# Altium PCB PCB.PcbDoc
Units mil, origin at the board's own origin, x right, y up, seen from the top; angles counter-clockwise.
Board outline 6000 x 4000 mil, 2 copper layers (Top Layer, Bottom Layer); 38 components, 82 nets, 220 pads, 24 vias.
Unrouted connection lines stored in the file: 58.
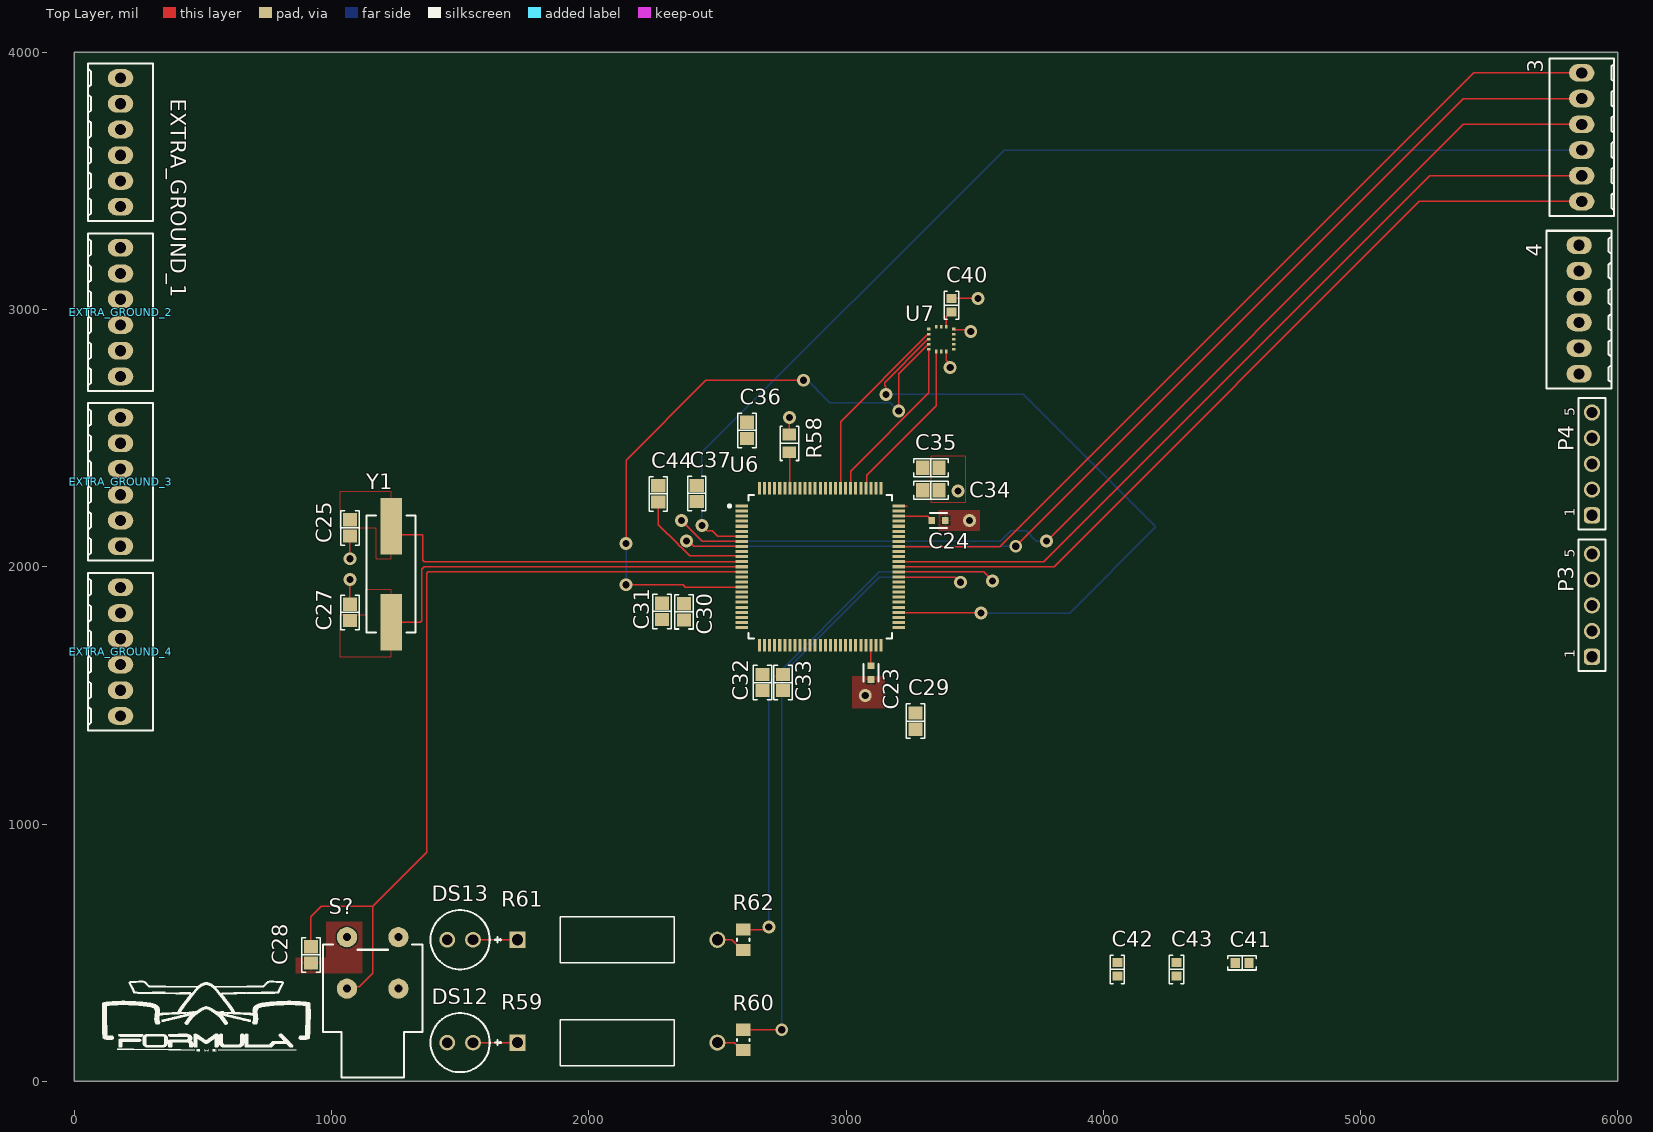
[diagram p0: Top Layer view]
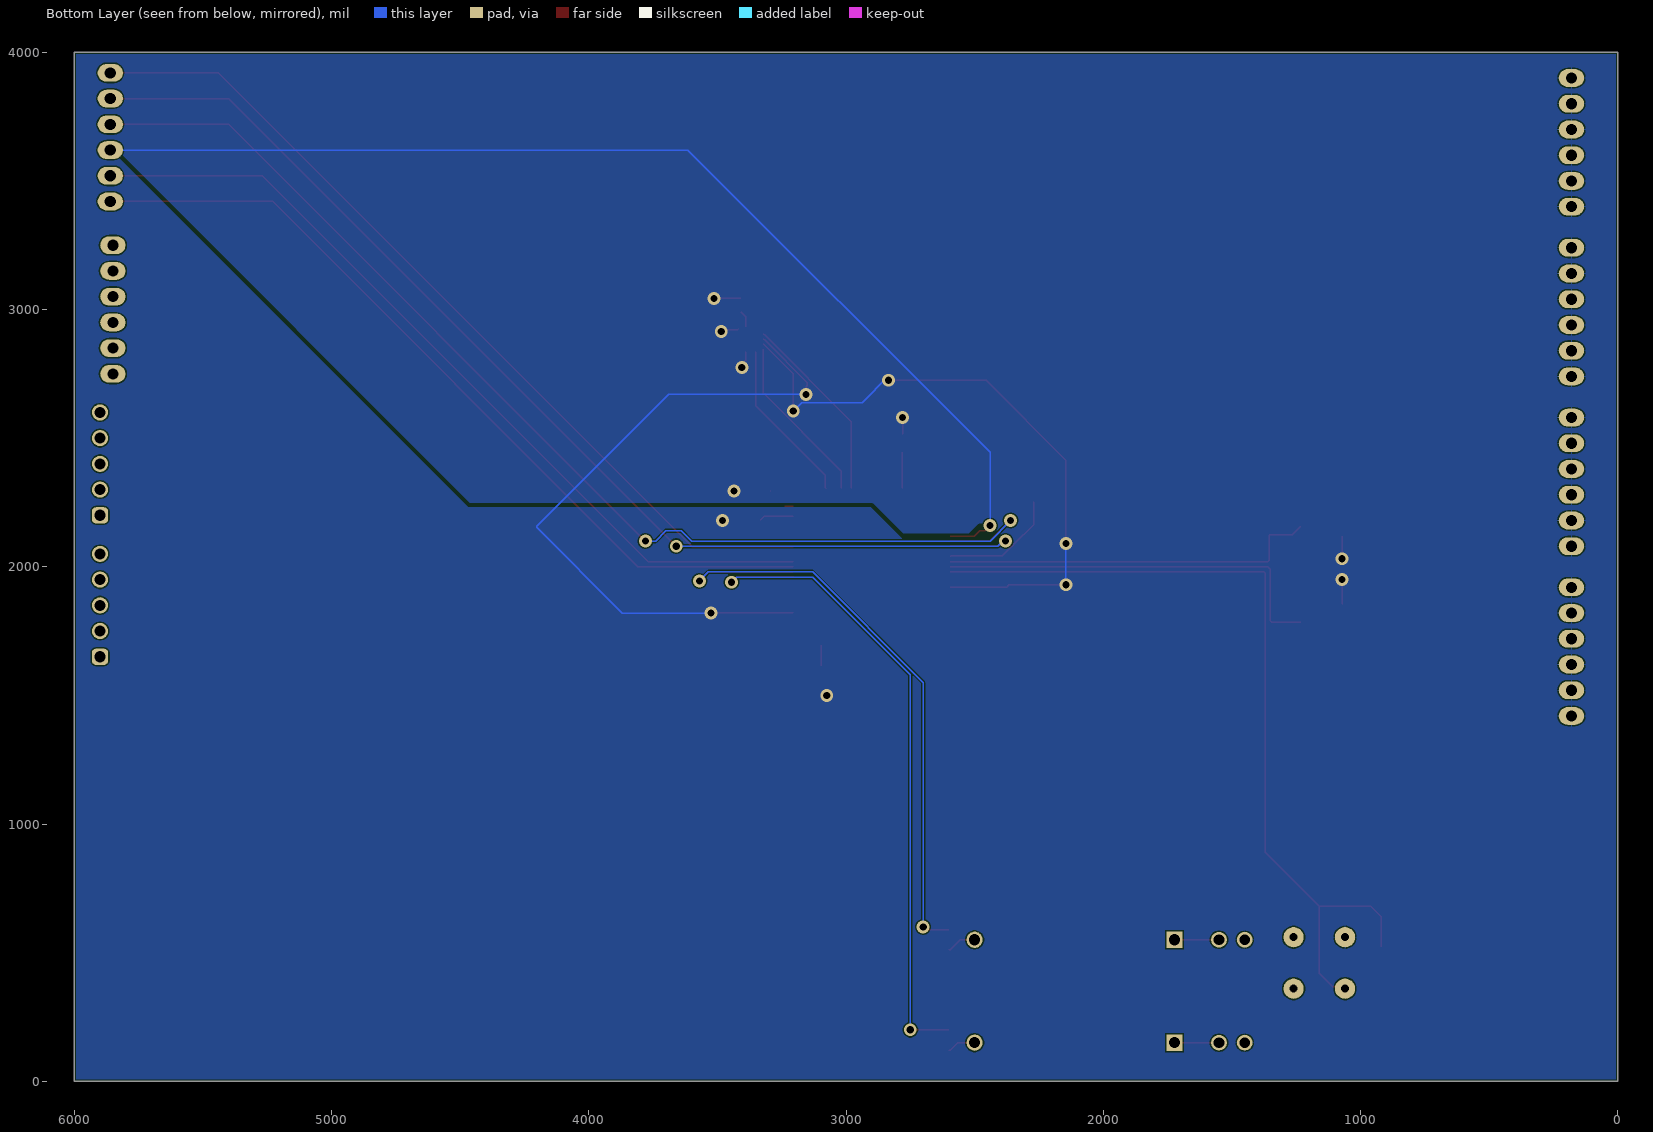
[diagram p1: Bottom Layer view, seen from below]

## Layer stack, top to bottom
Top Solder: solder mask 0.4, Solder Resist, Dk 3.5
Top Layer: signal copper 1.4
Dielectric 1: dielectric 12.6, FR-4, Dk 4.8
Bottom Layer: signal copper 1.4
Bottom Solder: solder mask 0.4, Solder Resist, Dk 3.5

## Board outline
0,0 6000,0 6000,4000 0,4000

## Design rules (kind name [scope] priority, off if disabled: settings)
BoardOutlineClearance [All] p1: gap=7.87 ignorepadtopadclearanceinfootprint=FALSE
Clearance [All] p1: gap=5 ignorepadtopadclearanceinfootprint=FALSE except(9.84: Arc-Hole Track-Hole SMDPad-Hole THPad-Hole Via-Hole Fill-Hole Poly-Hole Region-Hole Text-Hole)
ComponentClearance [All] p1: gap=5 collisioncheckmode=3 verticalgap=5 showdistances=TRUE
DiffPairsRouting [All] p1: maxlimit=10 minlimit=5 mostfreqgap=5 toplayer_minwidth=5 toplayer_maxwidth=1000 toplayer_prefwidth=5 bottomlayer_minwidth=5 bottomlayer_maxwidth=1000 bottomlayer_prefwidth=5 maxuncoupledlength=500
Height [All] p1: minheight=0 maxheight=71497.94 prefheight=500
HoleSize [All] p1: absolutevalues=TRUE maxlimit=248.03 minlimit=11.81 maxpercent=80.000 minpercent=20.000
HoleToHoleClearance [All] p1: gap=9.84 allowstackedmicrovias=FALSE
MinimumAnnularRing [All] p1: minimumring=3
MinimumSolderMaskSliver [All] p1: minsoldermaskwidth=0
PlaneClearance [All] p1: clearance=5
PlaneConnect PlaneConnectPowerPads [InPadClass('PowerPads')] p1: planeconnectstyle=Direct reliefexpansion=20 reliefentries=4 reliefconductorwidth=10 reliefairgap=10
PlaneConnect [All] p2: pad.planeconnectstyle=Relief pad.reliefexpansion=11.81 pad.reliefentries=4 pad.reliefconductorwidth=5 pad.reliefairgap=5 via.planeconnectstyle=Direct via.reliefexpansion=11.81 via.reliefentries=4 via.reliefconductorwidth=5 via.reliefairgap=5
PolygonConnect PolygonConnectPowerPads [All vs (InPadClass('PowerPads'))] p1: connectstyle=Direct reliefconductorwidth=10 reliefentries=4 polygonreliefangle="90 Angle" airgapwidth=10
PolygonConnect [All] p2: thpad.connectstyle=Relief thpad.reliefconductorwidth=5 thpad.reliefentries=4 thpad.polygonreliefangle="90 Angle" thpad.airgapwidth=5 smdpad.connectstyle=Relief smdpad.reliefconductorwidth=5 smdpad.reliefentries=4 smdpad.polygonreliefangle="90 Angle" smdpad.airgapwidth=5 via.connectstyle=Direct via.reliefconductorwidth=5 via.reliefentries=4 via.polygonreliefangle="90 Angle" via.airgapwidth=5
RoutingVias [All] p1: holewidth=11.81 width=23.62 viastyle="Through Hole" minholewidth=11.81 minwidth=23.62 maxholewidth=23.62 maxwidth=259.84
SilkToSilkClearance [All] p1: silktosilkclearance=0
SilkToSolderMaskClearance [IsPad] p1: minsilkscreentomaskgap=5 clearancetoexposedcopper=TRUE
SolderMaskExpansion [All] p1: expansion=2.95 istentingtop=FALSE
Width [All] p1: maxlimit=1000 minlimit=5 preferedwidth=5 minimp=50.000000 maximp=50.000000 favimp=50.000000
20 further rules are at their usual default settings.

## Classes and differential pairs
component class TOP: EXTRA_GROUND_1 EXTRA_GROUND_2 EXTRA_GROUND_3 EXTRA_GROUND_4
component class Microcontroller: 3 4 C23 C24 C25 C27 C28 C29 C30 C31 C32 C33 C34 C35 C36 C37 C44 DS12 DS13 P3 P4 R58 R59 R60 R61 R62 S1 S? U6 Y1
component class "Accelerometer And Gyro": C40 C41 C42 C43 U7

## Components (designator, comment, footprint, x,y, rotation, side; value= is the part's Value field where it differs from the comment)
3 "282834-6" "TE 282834-6" 5860,3670 r270 top
4 "282834-6" "TE 282834-6" 5850,3000 r270 top
C23 "GRM188R71A225KE15D" FP-GRM188-0_1-e0_2_0_5-MFG 3097,1588.43 r270 top
C24 "GRM188R71A225KE15D" FP-GRM188-0_1-e0_2_0_5-MFG 3360,2180 r0 top
C25 "8 pF" "CAP 0805_2012" 1071.66,2151.04 r270 top
C27 "8 pF" "CAP 0805_2012" 1071.66,1822.53 r90 top
C28 "0.1 µF" "CAP 0805_2012" 920,491.5 r90 top
C29 "0.1 µF" "CAP 0805_2012" 3270,1400 r90 top
C30 "0.1 µF" "CAP 0805_2012" 2370,1825 r90 top
C31 "0.1 µF" "CAP 0805_2012" 2285,1826.5 r90 top
C32 "0.1 µF" "CAP 0805_2012" 2675,1550 r90 top
C33 "0.1 µF" "CAP 0805_2012" 2755,1550 r90 top
C34 "0.1 µF" "CAP 0805_2012" 3330,2297.5 r180 top
C35 "1µF" "CAP 0805_2012" 3330,2385 r180 top
C36 "1µF" "CAP 0805_2012" 2615,2530 r270 top
C37 "1µF" "CAP 0805_2012" 2420,2285 r270 top
C40 "0.1 µF" "CAP 0603_1608" 3410,3016.57 r90 top
C41 "10000 pF" "CAP 0603_1608" 4540,460 r0 top
C42 "0.1 µF" "CAP 0603_1608" 4055,435 r90 top
C43 "2.2 µF" "CAP 0603_1608" 4285,435 r90 top
C44 "4.7 µF" "CAP 0805_2012" 2270,2283.5 r270 top
DS12 "HLMP-4740" AVAG-HLMP-4740 1500,150 r180 top
DS13 "HLMP-4740" AVAG-HLMP-4740 1500,550 r180 top
EXTRA_GROUND_1 "282834-6" "TE 282834-6" 180,3650 r90 top
EXTRA_GROUND_2 "282834-6" "TE 282834-6" 180,2990 r90 top
EXTRA_GROUND_3 "282834-6" "TE 282834-6" 180,2330 r90 top
EXTRA_GROUND_4 "282834-6" "TE 282834-6" 180,1670 r90 top
P3 "61300511121" 61300511121 5900,1850 r90 top
P4 "61300511121" 61300511121 5900,2400 r90 top
R58 "10 kOhms" "RES 0805_2012" 2780,2480 r270 top
R59 "AC01000005000JA100" RES_AC01_VIS 1723,150 r0 top
R60 "RC0805FR-071KL" RESC2013X60X35ML10T20 2600,160.63 r90 top
R61 "AC01000005000JA100" RES_AC01_VIS 1723,550 r0 top
R62 "RC0805FR-071KL" RESC2013X60X35ML10T20 2600,550 r90 top
S? "AB11AH-HC" "NKK AB11AH-HC" 1160,360 r180 top
U6 "STM32F446VET6" FP-LQFP100-1L-MFG 2900,2000 r0 top
U7 "ICM-20602" INSE-I62-16 3370,2885 r0 top
Y1 "8 MHz" "ABRACON ABLS" 1231.66,1971.04 r90 top

## Footprints (in the part's own frame and the unit in brackets; to place one, negate y for a bottom-side part, rotate by r counter-clockwise, add the part's x,y. Pads: shape width x height; smd on the part's side, far side on the other; paste and mask are expansions set on the pad)
61300511121 [mm] "Pin Header, pitch 2.54 mm, THT, Vertical, single row, 5p"
  rrect50% 1.6x1.6 hole 1.1: 1(-5.08,0)
  round 1.6 hole 1.1: 2(-2.54,0) 3(0,0) 4(2.54,0) 5(5.08,0)
  silkscreen extent -6.5,-1.35 6.5,1.35, body extent -6.35,-1.27 6.35,1.27, height 8.57
"ABRACON ABLS" [mm] "Crystal, 2-Leads, Body 4.70x11.40mm, Pitch 8.80mm, IPC Medium Density"
  rect 5.6x2.1 smd: 1(-4.75,0) 2(4.75,0)
  silkscreen extent -5.77,-2.43 5.77,2.43, body extent -6.35,-2.35 6.35,2.35, height 4.2
AVAG-HLMP-4740 [mm] "THD, 2-Leads, Dia 5.845mm, Pitch 2.54mm"
  round 1.55 hole 1.05: 1(-1.27,0) 2(1.27,0)
  silkscreen extent -3.92,-2.92 2.92,2.92
"CAP 0603_1608" [mm] "Chip Capacitor, 2-Leads, Body 1.60x0.80mm, IPC Medium Density"
  rect 0.9x1 smd: 1(-0.675,0) 2(0.675,0)
  silkscreen extent -1.4,-0.7 1.4,0.7, body extent -0.8,-0.41 0.8,0.41, height 0.82
"CAP 0805_2012" [mm] "Chip Capacitor, 2-Leads, Body 2.00x1.20mm, IPC Medium Density"
  rect 1.3x1.4 smd: 1(-0.8,0) 2(0.8,0)
  silkscreen extent -1.7,-0.9 1.7,0.9, body extent -1,-0.64 1,0.64, height 1.26
FP-GRM188-0_1-e0_2_0_5-MFG [mm]
  rect 0.65x0.7 smd paste+0 mask+0: 1(-0.675,0) 2(0.675,0)
  silkscreen extent -0.85,-0.75 0.85,0.75, body extent -1.1,-0.55 1.1,0.55, height 0.25
FP-LQFP100-1L-MFG [mm]
  rect 1.2x0.3 smd paste+0 mask+0: 1(-7.75,6) 2(-7.75,5.5) 3(-7.75,5) 4(-7.75,4.5) 5(-7.75,4) 6(-7.75,3.5) 7(-7.75,3) 8(-7.75,2.5) 9(-7.75,2) 10(-7.75,1.5) 11(-7.75,1) 12(-7.75,0.5) 13(-7.75,0) 14(-7.75,-0.5) 15(-7.75,-1) 16(-7.75,-1.5) 17(-7.75,-2) 18(-7.75,-2.5) 19(-7.75,-3) 20(-7.75,-3.5) 21(-7.75,-4) 22(-7.75,-4.5) 23(-7.75,-5) 24(-7.75,-5.5) 25(-7.75,-6) 51(7.75,-6) 52(7.75,-5.5) 53(7.75,-5) 54(7.75,-4.5) 55(7.75,-4) 56(7.75,-3.5) 57(7.75,-3) 58(7.75,-2.5) 59(7.75,-2) 60(7.75,-1.5) 61(7.75,-1) 62(7.75,-0.5) 63(7.75,0) 64(7.75,0.5) 65(7.75,1) 66(7.75,1.5) 67(7.75,2) 68(7.75,2.5) 69(7.75,3) 70(7.75,3.5) 71(7.75,4) 72(7.75,4.5) 73(7.75,5) 74(7.75,5.5) 75(7.75,6)
  rect 0.3x1.2 smd paste+0 mask+0: 26(-6,-7.75) 27(-5.5,-7.75) 28(-5,-7.75) 29(-4.5,-7.75) 30(-4,-7.75) 31(-3.5,-7.75) 32(-3,-7.75) 33(-2.5,-7.75) 34(-2,-7.75) 35(-1.5,-7.75) 36(-1,-7.75) 37(-0.5,-7.75) 38(0,-7.75) 39(0.5,-7.75) 40(1,-7.75) 41(1.5,-7.75) 42(2,-7.75) 43(2.5,-7.75) 44(3,-7.75) 45(3.5,-7.75) 46(4,-7.75) 47(4.5,-7.75) 48(5,-7.75) 49(5.5,-7.75) 50(6,-7.75) 76(6,7.75) 77(5.5,7.75) 78(5,7.75) 79(4.5,7.75) 80(4,7.75) 81(3.5,7.75) 82(3,7.75) 83(2.5,7.75) 84(2,7.75) 85(1.5,7.75) 86(1,7.75) 87(0.5,7.75) 88(0,7.75) 89(-0.5,7.75) 90(-1,7.75) 91(-1.5,7.75) 92(-2,7.75) 93(-2.5,7.75) 94(-3,7.75) 95(-3.5,7.75) 96(-4,7.75) 97(-4.5,7.75) 98(-5,7.75) 99(-5.5,7.75) 100(-6,7.75)
  silkscreen extent -9.07,-7.1 7.1,7.1, body extent -8.45,-8.45 8.45,8.45, height 0.25
INSE-I62-16 [mm] "LGA, 16-Leads, Body 3x3mm, Pitch 0.5mm"
  rect 0.35x0.25 smd: 1(-1.225,1) 2(-1.225,0.5) 3(-1.225,0) 4(-1.225,-0.5) 5(-1.225,-1) 9(1.225,-1) 10(1.225,-0.5) 11(1.225,0) 12(1.225,0.5) 13(1.225,1)
  rect 0.25x0.35 smd: 6(-0.5,-1.225) 7(0,-1.225) 8(0.5,-1.225) 14(0.5,1.225) 15(0,1.225) 16(-0.5,1.225)
  body extent -1.5,-1.5 1.5,1.5, height 0.8
"NKK AB11AH-HC" [mm]
  round 2 hole 0.8: 1(2.54,-5.08) 2(2.54,0) 3(-2.54,-5.08) 4(-2.54,0)
  silkscreen extent -4.9,-4.34 4.9,8.76, body extent -4.9,-5.39 4.9,15.08, height 7.06
"RES 0805_2012" [mm] "Chip Resistor, 2-Leads, Body 2.00x1.25mm, IPC Medium Density"
  rect 1.15x1.35 smd: 1(-0.875,0) 2(0.875,0)
  silkscreen extent -1.7,-0.9 1.7,0.9, body extent -1,-0.62 1,0.63, height 0.6
RES_AC01_VIS [mil]
  rect 63x63 / inner round 60 / far side rect 63x63 hole 43 paste-31.5 mask+0: 1(0,0)
  round 63 / inner round 60 / far side round 63 hole 43 paste-31.5 mask+0: 2(777,0)
  silkscreen extent -69,-90 610,90, body extent -16,-84 794,84, height 169
RESC2013X60X35ML10T20 [mm] "Chip Resistor, 2-Leads, Body 2.1x1.35mm, IPC Low Density"
  rect 1.2x1.45 smd: 1(-1,0) 2(1,0)
  silkscreen extent -0.1,-0.63 0.1,0.63, body extent -1.05,-0.68 1.05,0.67, height 0.6
"TE 282834-6" [mm]
  oval 1.75x2.5 hole 1.1: 1(-6.35,0) 2(-3.81,0) 3(-1.27,0) 4(1.27,0) 5(3.81,0) 6(6.35,0)
  silkscreen extent -7.78,-3.2 7.78,3.2, body extent -7.85,-3.25 7.85,3.25, height 10

## Part data
3 4 EXTRA_GROUND_1 EXTRA_GROUND_2 EXTRA_GROUND_3 EXTRA_GROUND_4: "TERM BLK 6P SIDE ENT 2.54MM PCB", Color=Green, Current=10A, Manufacturer="TE Connectivity AMP Connectors", Supplier Part Number 1=A98337-ND, Voltage=150V, ComponentLink1Description=Datasheet, ComponentLink1URL=https://www.te.com/commerce/DocumentDelivery/DDEController?Action=srchrtrv&DocNm=282834&DocType=Customer+Drawing&DocLang=English, ComponentLink2Description="DigiKey Link", ComponentLink2URL=http://digikey.com/product-detail/en/te-connectivity-amp-connectors/282834-6/A98337-ND/1153267, LastUpdated="2020-01-15 4:16:31 AM", Lifecycle Status=Active, Mating Orientation="Horizontal with Board", Minimum Order=1, Mounting Type="Through Hole", Number of Levels=1, Packaging=Bulk, Part Number=282834-6, Part Status=Active, Pitch="0.100\" (2.54mm)", Positions Per Level=6, Price=4.72, Series=Buchanan, Supplier 1=DigiKey, Wire Gauge="16-30 AWG", Wire Termination="Screw - Rising Cage Clamp"
C23 C24: library part CMP-2006-02836-2, "Chip Multilayer Ceramic Capacitors for General Purpose, 0603, 2.2uF, X7R, 15%, 10%, 10V", Capacitance=2.2uF, Case Code (Imperial)=0603, Case Code (Metric)=1608, Dielectric=X7R, Max Operating Temperature=125°C, Min Operating Temperature=-55°C, Package Quantity=1, Tolerance=10%, Voltage=10V, Case/Package=0603, Depth=0.8mm, Height=0.8mm, Lead Free="Lead Free", Length=1.6mm, Material=Ceramic, Mount="Surface Mount", Number of Pins=2, Packaging="Cut Tape", REACH SVHC="No SVHC", Termination=SMD/SMT, Thickness=0.035inch, Voltage Rating=10V, Voltage Rating (DC)=10V, Weight=7.1E-05oz, Width=0.031inch
C25 C27: library part CBR08C809CAGAC, "CAP CER 8PF 250V C0G/NP0 0805", Part Number=CBR08C809CAGAC
C28 C29 C30 C31 C32 C33 C34: library part CC0805MRX7R9BB104, "CAP CER 0.1UF 50V X7R 0805", Part Number=CC0805MRX7R9BB104
C35 C36 C37: library part MM05ZC105KCZ2A, "CAP CER 1UF 10V X7R 0805", Part Number=MM05ZC105KCZ2A
C40 C42: library part C0603C104K5RAC7411, "CAP CER 0.1UF 50V X7R 0603", Device Package="0603 (1608 Metric)", Manufacturer=KEMET, Operating Temperature="-55°C ~ 125°C", Supplier Part Number 1=399-C0603C104K5RAC7411CT-ND, Temperature Coefficient=X7R, Tolerance=±10%, Voltage - Rated=50V, Applications="Bypass, Decoupling", Capacitance="0.1 µF", ComponentLink1Description=Datasheet, ComponentLink1URL=https://api.kemet.com/component-edge/download/datasheet/C0603C104K5RAC7411.pdf, ComponentLink2Description="DigiKey Link", ComponentLink2URL=https://www.digikey.com/en/products/detail/kemet/C0603C104K5RAC7411/3317013, LastUpdated="2023-06-07 7:13:18 PM", Lifecycle Status=Active, Minimum Order=1, Mounting Type="Surface Mount, MLCC", Package / Case="0603 (1608 Metric)", Packaging=TapeAndReel, Part Number=C0603C104K5RAC7411, Part Status=Active, partid=2233, Price=0.01, Series="SMD Comm X7R", Size / Dimension="0.063\" L x 0.031\" W (1.60mm x 0.80mm)", Supplier 1=DigiKey, Thickness (Max)="0.035\" (0.90mm)"
C41: library part C0603C103K4RECAUTO, "CAP CER 0603 10NF 16V X7R 10%", Device Package="0603 (1608 Metric)", Manufacturer=KEMET, Operating Temperature="-55°C ~ 125°C", Ratings=AEC-Q200, Supplier Part Number 1=399-17880-1-ND, Temperature Coefficient=X7R, Tolerance=±10%, Voltage - Rated=16V, Applications="Automotive, ESD Protection", Capacitance="10000 pF", ComponentLink1Description=Datasheet, ComponentLink1URL=https://api.kemet.com/component-edge/download/datasheet/C0603C103K4RECAUTO.pdf, ComponentLink2Description="DigiKey Link", ComponentLink2URL=https://www.digikey.com/en/products/detail/kemet/C0603C103K4RECAUTO/8640474, LastUpdated="2023-06-07 7:13:03 PM", Lifecycle Status=Active, Minimum Order=1, Mounting Type="Surface Mount, MLCC", Package / Case="0603 (1608 Metric)", Packaging=TapeAndReel, Part Number=C0603C103K4RECAUTO, Part Status=Active, partid=8251, Price=0.01, Series="ESD SMD Auto X7R", Size / Dimension="0.063\" L x 0.031\" W (1.60mm x 0.80mm)", Supplier 1=DigiKey, Thickness (Max)="0.034\" (0.87mm)"
C43: library part CC0603ZRY5V6BB225, "CAP CER 2.2UF 10V Y5V 0603", Device Package="0603 (1608 Metric)", Manufacturer=Yageo, Operating Temperature="-30°C ~ 85°C", Supplier Part Number 1=311-1450-1-ND, Temperature Coefficient="Y5V (F)", Tolerance="-20%, +80%", Voltage - Rated=10V, Applications="General Purpose", Capacitance="2.2 µF", ComponentLink1Description=Datasheet, ComponentLink1URL=http://www.yageo.com/documents/recent/UPY-GPHC_Y5V_6.3V-to-50V_8.pdf, ComponentLink2Description="DigiKey Link", ComponentLink2URL=https://www.digikey.com/en/products/detail/yageo/CC0603ZRY5V6BB225/2833615, LastUpdated="2023-06-07 7:13:18 PM", Lifecycle Status=Active, Minimum Order=1, Mounting Type="Surface Mount, MLCC", Package / Case="0603 (1608 Metric)", Packaging=TapeAndReel, Part Number=CC0603ZRY5V6BB225, Part Status=Active, partid=2248, Price=0.01, Series=CC, Size / Dimension="0.063\" L x 0.031\" W (1.60mm x 0.80mm)", Supplier 1=DigiKey, Thickness (Max)="0.035\" (0.90mm)"
C44: library part C0805X475J9RACAUTO, "CAP CER 4.7UF 6.3V X7R 0805", Part Number=C0805X475J9RACAUTO
DS12 DS13: library part CMP-2000-06413-1, "T-1 3/4 (5 mm) Low Current LED Lamp, Green, 1.9 V, -20 to 100 degC, 2-Pin THD, RoHS, Bulk", Color=Green, Dominant Wavelength/Color Temperature=569nm, Manufacturer=AvagoTechnologies, Package=2T-13/4, Package Description="2-Pin Through Hole Device, Dia 5.845 mm, Pitch 2.54 mm", Category=LEDs, Datasheet URL=http://docs.avagotech.com/docs/AV02-1557EN, Datasheet Version=07/2014, Intensity=2.3mcd, Lens Appearance=ColoredDiffused, Lens Shape Type=Circular, Manufacturer URL=http://www.avagotech.com/, Mounting=ThroughHole, Mounting Orientation=TopMount, Mounting Technology=ThroughHole, Number of LEDs=1, Package Reference=HLMP-4740, Packaging=Bulk, Peak Wavelength=565nm, Pin Count=2, Rad Hard=No, Type=Uni-Color, Viewing Angle=50°
P3 P4: library part CMP-1502-01068-2, Color=Black, Contact Resistance=20mΩ, Current Rating=3A, Max Operating Temperature=105°C, Min Operating Temperature=-40°C, Operating Supply Voltage=250V, Connector Type="Male Pin", Contact Material=Copper, Contact Mating Length=5.9944mm, Contact Plating=Gold, Gender=Male, Height=8.89mm, Lead Free="Lead Free", Lead Pitch=2.54mm, Mount="Through Hole", NexarPartId=32855526, Number of Contacts=5, Number of Pins=5, Number of Positions=5, Number of Rows=1, Orientation=Vertical, Packaging=Bulk, Pitch=2.54mm, REACH SVHC=Unknown, RoHS=Compliant, Termination=Solder, Voltage Rating=250V
R58: library part RNCS0805BKE10K0, "RES 10K OHM 0.1% 1/10W 0805", Device Package="0805 (2012 Metric)", Manufacturer="Stackpole Electronics Inc", Operating Temperature="-55°C ~ 155°C", Power (Watts)="0.1W, 1/10W", Ratings=AEC-Q200, Supplier Device Package=0805, Supplier Part Number 1=RNCS0805BKE10K0CT-ND, Temperature Coefficient=±25ppm/°C, Tolerance=±0.1%, ComponentLink1Description=Datasheet, ComponentLink1URL=https://www.seielect.com/catalog/sei-rncs_rnch.pdf, ComponentLink2Description="DigiKey Link", ComponentLink2URL=https://www.digikey.com/en/products/detail/stackpole-electronics-inc/RNCS0805BKE10K0/1800067, Composition="Thin Film", Features="Anti-Corrosive, Automotive AEC-Q200, Moisture Resistant", Height - Seated (Max)="0.026\" (0.65mm)", LastUpdated="2023-10-12 7:56:55 PM", Lifecycle Status=Active, Minimum Order=1, Number of Terminations=2, Package / Case="0805 (2012 Metric)", Packaging=TapeAndReel, Part Number=RNCS0805BKE10K0, Part Status=Active, partid=27713, Price=0.07, Resistance="10 kOhms", Series=RNCS, Size / Dimension="0.079\" L x 0.049\" W (2.00mm x 1.25mm)", Supplier 1=DigiKey
R59 R61: library part CMP-00030-39746512-1, "AC01000005000JA100 Res Wirewound 500 Ohm 5% 1W 100ppm/°C to 180ppm/°C Conformal AXL Thru-Hole Ammo Pack", Case/Package=Axial, Max Operating Temperature=275°C, Max Power Dissipation=1W, Min Operating Temperature=-40°C, Resistance=500Ω, Temperature Coefficient=180ppm/°C, Tolerance=5%, Voltage Rating=22V, Composition=Wirewound, Contact Plating=Tin, Diameter=4.3mm, Features="Flame Retardant Coating", Lead Diameter=800µm, Length=11mm, NexarPartId=39746512, Number of Pins=2, Number of Terminations=2, Packaging="Tape & Box (TB)", Power Rating=1W, Radiation Hardening=No, REACH SVHC=Unknown, RoHS=Compliant, Schedule B="8533210080, 8533210080", Termination=Axial, Voltage Rating (DC)=22V, Weight=519.986953mg
R60 R62: library part CMP-2100-03671-1, "Chip Resistor, 1 KOhm, +/- 1%, 125 mW, -55 to 155 degC, 0805 (2012 Metric), RoHS, Tape and Reel", Case Code (Imperial)=0805, Case Code (Metric)=2012, Manufacturer=Yageo, Max Operating Temperature=155degC, Max Power Dissipation=125mW, Min Operating Temperature=-55degC, Package Description="2-Pin Surface Mounted Device, Body 2 x 1.25 mm", Package Quantity=1, Resistance=1KOhm, Temperature Coefficient=100ppm/degreesC, Tolerance=1%, Voltage Rating=150V, Case/Package=0805, Composition=ThickFilm, Datasheet URL=http://www.yageo.com/NewPortal/yageodocoutput?fileName=/pdf/R-Chip/PYu-RC_Group_51_RoHS_L_5.pdf, Datasheet Version="Rev. 5, 10/2016", Depth=1.25mm, Height=0.024inch, Lead Free=LeadFree, Length=0.079inch, Manufacturer URL=http://www.yageo.com/, Military Standard=Not, Number of Pins=2, Number of Terminations=2, Package Reference=0805, Packaging=TapeandReel, Power Rating=125mW, REACH SVHC=Unknown, RoHSCompliant=true, Termination=SMD/SMT, Voltage Rating (DC)=150V, Width=0.049inch
S?: "SWITCH PUSH SPST-NO 0.4VA 28V", Color - Actuator/Cap=Red, Current Rating (Amps)="0.4VA (AC/DC)", Manufacturer="NKK Switches", Operating Temperature="-30°C ~ 85°C", Supplier Part Number 1=360-2604-ND, Voltage Rating - AC=28V, Actuator Type="Round, Button", Circuit=SPST-NO, ComponentLink1Description=Datasheet, ComponentLink1URL=https://www.nkkswitches.com/pdf/Apushbuttons.pdf, ComponentLink2Description="DigiKey Link", ComponentLink2URL=http://digikey.com/product-detail/en/nkk-switches/AB11AH-HC/360-2604-ND/1056046, Features="Sealed - Fully", LastUpdated="2020-01-25 8:05:42 PM", Lifecycle Status=Active, Minimum Order=1, Mounting Type="Through Hole, Right Angle", Packaging=Tray, Part Number=AB11AH-HC, Part Status=Active, Price=5.00, Series=AB, Supplier 1=DigiKey, Switch Function=Off-Mom, Termination Style="PC Pin", Type=Standard, Voltage Rating - DC=28V
U6: library part CMP-12105-000075-1, "IC MCU 32BIT 512KB FLASH 100LQFP", Ambient Temperature Range High=+85°C, Ambient Temperature Range Low=-40°C, Frequency=180MHz, Manufacturer=STMicroelectronics, Max Junction Temp=+125°C, Max Supply Voltage=3.6V, Min Supply Voltage=1.65V, Nominal Supply Current=1.4-86mA, Package=LQFP100-1L, Temperature="-40°C to +85°C", Automotive=No, Category=IC, ComponentLink2Description=Datasheet, ComponentLink2URL=https://www.st.com/resource/en/datasheet/stm32f446ve.pdf, Core Architecture="ARM Cortex-M4", Data Bus Width=32bits, Device Class L1="Integrated Circuits (ICs)", Device Class L2="Embedded Processors and Controllers", Device Class L3=Microcontrollers, Digikey Description="IC MCU 32BIT 512KB FLASH 100LQFP", Height=1.6mm, Interface=I2C,SPI,UART,USART,Parallel,CAN,USB,LIN,IrDA,I2S,Other, Ipc Land Pattern Name=QFP50P1600X1600X160-100, Lead Free=Yes, Manufacturer Part Number=STM32F446VET6, Memory Size=512KBytes, Memory Type=FLASH, Mouser Description="ARM Microcontrollers - MCU High-performance and DSP with FPU, ARM Cortex-M4 MCU with 512 Kbytes Flash, 180 MHz CPU, Art Accelerator, SDRAM", Number Of A/D Converters=3, Number Of Adc Channels=16, Number Of Cores=1, Number Of I2C Channels=4, Number Of I/Os=81, Number Of Spi Channels=4, Number Of Timers/Counters=14, Number Of Uart Channels=6, Number Of Usb Channels=2, Octopart=https://octopart.com/stm32f446vet6-stmicroelectronics-52642922, Ram Size=128KBytes, RoHS=TRUE, Standoff Height=0.05mm, Temperature Range High=+85°C, Temperature Range Low=-40°C
U7: library part CMP-2000-07589-1, "High Performance 6-Axis MEMS MotionTracking(TM) Device, 1.71 to 3.45 V, -40 to 85 degC, 16-Pin LGA, RoHS", Manufacturer=InvenSense, Max Operating Temperature=85degC, Min Operating Temperature=-40degC, Package Description="16-Pin Land Grid Array, Body 3 x 3 mm, Pitch 0.5 mm", Package Reference=I62-16, Datasheet URL=http://www.invensense.com/wp-content/uploads/2016/10/DS-000176-ICM-20602-v1.0.pdf, Datasheet Version="Rev. 1.0, 10/2016", Manufacturer URL=http://www.invensense.com/, Mounting Technology=SurfaceMount, Output Type=I2C, RoHSCompliant=True, Sensor Type=Temperature
Y1: library part ABLS-8.000MHZ-SD7Y-T, "CRYSTAL 8.0000MHZ 18PF SMD", ESR (Equivalent Series Resistance)="80 Ohms", Frequency Stability=±30ppm, Frequency Tolerance=±15ppm, Load Capacitance=18pF, Manufacturer="Abracon LLC", Operating Mode=Fundamental, Operating Temperature="-40°C ~ 85°C", Package / Case=HC-49/US, Supplier Part Number 1=535-14365-2-ND, ComponentLink1Description=Datasheet, ComponentLink1URL=https://abracon.com/Resonators/abls.pdf, ComponentLink2Description="DigiKey Link", ComponentLink2URL=https://www.digikey.com/en/products/detail/abracon-llc/ABLS-8-000MHZ-SD7Y-T/8581989, Frequency="8 MHz", Height - Seated (Max)="0.165\" (4.20mm)", LastUpdated="2023-10-12 8:28:08 PM", Lifecycle Status=Active, Minimum Order=1, Mounting Type="Surface Mount", Packaging=CutTape, Part Number=ABLS-8.000MHZ-SD7Y-T, Part Status=Active, partid=25, Price=0.27, Series=ABLS, Size / Dimension="0.449\" L x 0.185\" W (11.40mm x 4.70mm)", Supplier 1=DigiKey, Type="MHz Crystal"

## Via types
v1: diameter 50, hole 28, Top Layer to Bottom Layer, 24 vias

## Nets (pads, with @x,y where several pads share a name; then routed paths per layer and width w, separated by ;. In a path a pad name is that pad's centre, name@x,y a point inside that pad or via, vN(x,y) a via of type N, cw(c..) or ccw(c..) an arc to the next point about the centre after c; other vN are vias at no path point)
5-3_1: U6.29
5-3_2: U6.30
5-3_3: U6.31
5-3_4: U6.32
5-3_5: U6.33
5-3_6: U6.34
12-3_1: U6.15
12-3_2: U6.16
12-3_3: U6.36
12-3_4: U6.18
12-3_5: U6.26
12-3_6: U6.25
AC_CS: U6.82 U7.5 | length 666.3
  Top Layer w5: U6.82 3018.11,2372.15 3321.77,2675.81 U7.5
AC_INT: U6.79 U7.6 | length 644.8
  Top Layer w5: U6.79 3080,2307.95 3080,2355 3350.31,2625.31 U7.6
AC_SCL: U6.84 U7.2 | length 743.3
  Top Layer w5: U6.84 2978.74,2564.39 3311.78,2897.42 3312.54,2897.42 3319.8,2904.69 U7.2
AC_SDI: U6.54 U7.3 | length 2691.2
  Top Layer w5: v1(3155,2670) 3155,2700 3150,2705 3150,2715.96 3311.78,2877.74 3312.54,2877.74 3319.8,2885 U7.3 ; U6.54 3206.54,1821.42 3523.58,1821.42 v1(3525,1820)
  Bottom Layer w5: v1(3155,2670) 3690,2670 4202.93,2157.07 4202.93,2152.93 3870,1820 v1(3525,1820)
AC_SDO: U6.17 U7.4 | length 2500.2
  Top Layer w5: v1(2145,1930) 2367.11,1930 2375.85,1921.26 U6.17 ; v1(2145,2090) 2145,2415 2455,2725 v1(2835,2725) ; v1@3210,2600 v1(3205,2605) 3205,2751.28 3311.78,2858.05 3312.54,2858.05 3319.8,2865.32 U7.4
  Bottom Layer w5: v1(2145,1930) v1(2145,2090) ; v1@2835,2740 2937.5,2637.5 3172.5,2637.5 v1(3205,2605)
CAN1_RX: U6.70
CAN1_STBY: U6.69
CAN1_TX: U6.71
CAN2_RX: U6.51
CAN2_STBY: U6.53
CAN2_TX: U6.52
EX_PIN_1: 3.1 U6.67 | length 3417.6
  Top Layer w5: U6.67 3598.65,2078.74 5439.91,3920 3.1
EX_PIN_2: P4.5 U6.81
EX_PIN_3: P4.4 U6.83
EX_PIN_4: P4.3 U6.85
EX_PIN_5: P4.2 U6.60
EX_PIN_6: P4.1 U6.97
EX_PIN_7: P3.5 U6.98
EX_PIN_8: P3.4 U6.2
EX_PIN_9: P3.3 U6.4
EX_PIN_10: P3.2 U6.40
EX_PIN_11: P3.1 U6.41
GND: C23.2 C24.2 C25.2 C27.2 C28.1 C29.1 C30.1 C31.1 C32.1 C33.1 C34.1 C35.1 C36.1 C37.1 C40.2 C41.1 C42.1 C43.1 C44.1 DS12.2 DS13.2 EXTRA_GROUND_1.1 EXTRA_GROUND_1.2 EXTRA_GROUND_1.3 EXTRA_GROUND_1.4 EXTRA_GROUND_1.5 EXTRA_GROUND_1.6 EXTRA_GROUND_2.1 EXTRA_GROUND_2.2 EXTRA_GROUND_2.3 EXTRA_GROUND_2.4 EXTRA_GROUND_2.5 EXTRA_GROUND_2.6 EXTRA_GROUND_3.1 EXTRA_GROUND_3.2 EXTRA_GROUND_3.3 EXTRA_GROUND_3.4 EXTRA_GROUND_3.5 EXTRA_GROUND_3.6 EXTRA_GROUND_4.1 EXTRA_GROUND_4.2 EXTRA_GROUND_4.3 EXTRA_GROUND_4.4 EXTRA_GROUND_4.5 EXTRA_GROUND_4.6 R58.1 S?.1 U6.10 U6.20 U6.27 U6.49 U6.74 U6.99 U7.8 U7.13 | length 493
  Top Layer w5: C27.2 v1(1071.66,1951.04) ; v1(1071.66,2031.04) C25.2 ; R58.1 v1(2780,2580) ; U7.8 3389.69,2802.49 3405,2787.18 v1(3405,2775) ; C40.2 v1(3513.15,3043.15) ; U7.13 3420.65,2921.95 3478.05,2921.95 v1(3485,2915)
  other v1: 3075,1500 3480,2180 3435,2295
Net3_2: 3.2 U6.9 | length 4432.7
  Top Layer w5: v1(2380,2100) 2388.24,2100 2408.87,2079.37 2594.25,2079.37 U6.9 ; v1(3660,2080) 5400,3820 3.2
  Bottom Layer w5: v1(2380,2100) 2389.5,2100 2409.5,2080 v1(3660,2080)
Net3_3: 3.3 U6.8 | length 4506
  Top Layer w5: v1(2360,2180) 2441.57,2098.43 U6.8 ; v1(3780,2100) 5400,3720 3.3
  Bottom Layer w5: v1(2360,2180) 2440,2100 3600,2100 3640,2140 3700,2140 3740,2100 v1(3780,2100)
Net3_4: 3.4 U6.7 | length 4363.9
  Top Layer w5: v1(2440,2160) 2460,2140 2480,2140 2501.89,2118.11 U6.7
  Bottom Layer w5: v1(2440,2160) 2440,2445 3615,3620 3.4
Net3_5: 3.5 U6.64 | length 3276.3
  Top Layer w5: U6.64 3769.12,2019.68 5269.43,3520 3.5
Net3_6: 3.6 U6.63 | length 3243.1
  Top Layer w5: U6.63 3809.28,2000 5229.28,3420 3.6
Net4_1: 4.1 U6.88
Net4_2: 4.2 U6.55
Net4_3: 4.3 U6.56
Net4_4: 4.4 U6.57
Net4_5: 4.5 U6.58
Net4_6: 4.6 U6.59
NetC23_1: C23.1 U6.48 | length 79.9
  Top Layer w5: U6.48 3096.85,1615.15 C23.1
NetC24_1: C24.1 U6.73 | length 135.9
  Top Layer w5: U6.73 3317.56,2196.85 3333.43,2180.98 C24.1
NetC25_1: C25.1 U6.12 Y1.2 | length 1477.4
  Top Layer w5: Y1.2 1264.7,2125 1352.07,2125 1355,2122.07 1355,2025 1360.32,2019.68 U6.12
NetC27_1: C27.1 U6.13 Y1.1 | length 1569.8
  Top Layer w5: Y1.1 1344.03,1784.03 1350,1790 1350,1990 1360,2000 U6.13
NetC40_1: C40.1 U7.14 | length 66.3
  Top Layer w5: U7.14 3389.69,2971.65 3408.03,2990 C40.1
NetDS12_1: DS12.1 R59.1 | length 173
  Top Layer w5: DS12.1 R59.1
NetDS13_1: DS13.1 R61.1 | length 173
  Top Layer w5: DS13.1 R61.1
NetR58_2: R58.2 U6.94 | length 141.2
  Top Layer w5: R58.2 2781.89,2443.66 U6.94
NetR59_2: R59.2 R60.1 | length 111.9
  Top Layer w5: R59.2 2566.34,150 2595.08,121.26 R60.1
NetR60_2: R60.2 U6.61 | length 2644.1
  Top Layer w5: R60.2 v1(2750,200) ; U6.61 3205.75,1960 3425,1960 v1(3445,1940)
  Bottom Layer w5: v1(2750,200) 2750,1580 3130,1960 3425,1960 v1(3445,1940) v1@3440,1940
NetR61_2: R61.2 R62.1 | length 116.3
  Top Layer w5: R61.2 2555.71,550 2595.08,510.63 R62.1
NetR62_2: R62.2 U6.62 | length 2496.5
  Top Layer w5: R62.2 2689.37,589.37 v1(2700,600) ; U6.62 3205.43,1980 3535,1980 v1(3570,1945)
  Bottom Layer w5: v1(2700,600) 2700,1550 3130,1980 3535,1980 v1(3570,1945)
NetU6_1: U6.1
NetU6_3: U6.3
NetU6_5: U6.5
NetU6_23: U6.23
NetU6_24: U6.24
NetU6_35: U6.35
NetU6_38: U6.38
NetU6_39: U6.39
NetU6_44: U6.44
NetU6_45: U6.45
NetU6_46: U6.46
NetU6_65: U6.65
NetU6_66: U6.66
NetU6_72: U6.72
NetU6_76: U6.76
NetU6_77: U6.77
NetU6_78: U6.78
NetU6_80: U6.80
NetU6_86: U6.86
NetU6_87: U6.87
NetU6_92: U6.92
NetU6_93: U6.93
NRST_n: C28.2 S?.2 U6.14 | length 3367.5
  Top Layer w5: C28.2 920,640 960,680 1160,680 ; S?.2 1066.87,366.87 1106.87,366.87 1160,420 1160,680 ; U6.14 1375.32,1980.32 1370,1975 1370,890 1160,680
VCC3V3: C30.2 C31.2 C32.2 C33.2 C34.2 C35.2 C36.2 C37.2 C41.2 C42.2 C43.2 C44.2 U6.6 U6.11 U6.19 U6.21 U6.22 U6.28 U6.50 U6.75 U6.100 U7.1 U7.16 | length 499.5
  Top Layer w5: C44.2 2270,2164.14 2347.5,2086.64 2347.5,2086.54 2366.54,2067.5 2366.64,2067.5 2392.07,2042.07 2592.18,2042.07 U6.11 ; U6.75 3238.19,2236.22 ; C34.2@3295,2293.03 C34.2@3295,2295
pads on no net: C29.2 S?.3 S?.4 U6.37 U6.42 U6.43 U6.47 U6.68 U6.89 U6.90 U6.91 U6.95 U6.96 U7.7 U7.9 U7.10 U7.11 U7.12 U7.15

## Polygon pours and split planes (outlines as drawn)
NetC25_1 on Top Layer "NETC25_1_L01_P002" (solid, pour order 2): 1031.66,2291.04 1031.66,2151.04 1171.66,2151.04 1171.66,2031.04 1231.66,2031.04 1231.66,2291.04
NetC27_1 on Top Layer "NETC27_1_L01_P004" (solid, pour order 4): 1031.66,1811.04 1031.66,1651.04 1231.66,1651.04 1231.66,1911.04 1131.66,1911.04 1131.66,1811.04
GND on Top Layer (solid, pour order 11): 3330,2250 3465,2250 3465,2430 3330,2430 3330,2345
GND on Top Layer "GND_L01_P006" (solid, pour order 6): 3025,1575 3150,1575 3150,1450 3025,1450
GND on Top Layer "GND_L01_P005" (solid, pour order 5): 3360,2220 3360,2140 3520,2140 3520,2220
GND on Top Layer "GND_L01_P000" (solid, pour order 0): 860,480 980,480 980,620 1120,620 1120,420 860,420
GND on Bottom Layer "GND_L02_P001" (solid, pour order 1): -480,4515 -480,-405 6680,-405 6680,4535

## Silkscreen, mask and mechanical layers (free items; w line width, h text height)
Top Overlay:
  drawing of 13 lines, arcs and shapes, not listed

## Text inside footprints (layer, text, board x,y; h text height)
P3: Top Overlay "1" at 5833.07,1645.28 h40 r90; Top Overlay "5" at 5833.07,2035.04 h40 r90
P4: Top Overlay "1" at 5833.07,2195.28 h40 r90; Top Overlay "5" at 5833.07,2585.04 h40 r90